# Altium PCB Optical Compressor.PcbDoc (part 2 of 2)
Units mm, origin at the board's own origin, x right, y up, seen from the top; angles counter-clockwise.
Board outline 100 x 100 mm, 2 copper layers (Top Layer, Bottom Layer); 101 components, 65 nets, 289 pads, 0 vias.
Unrouted connection lines stored in the file: 219.
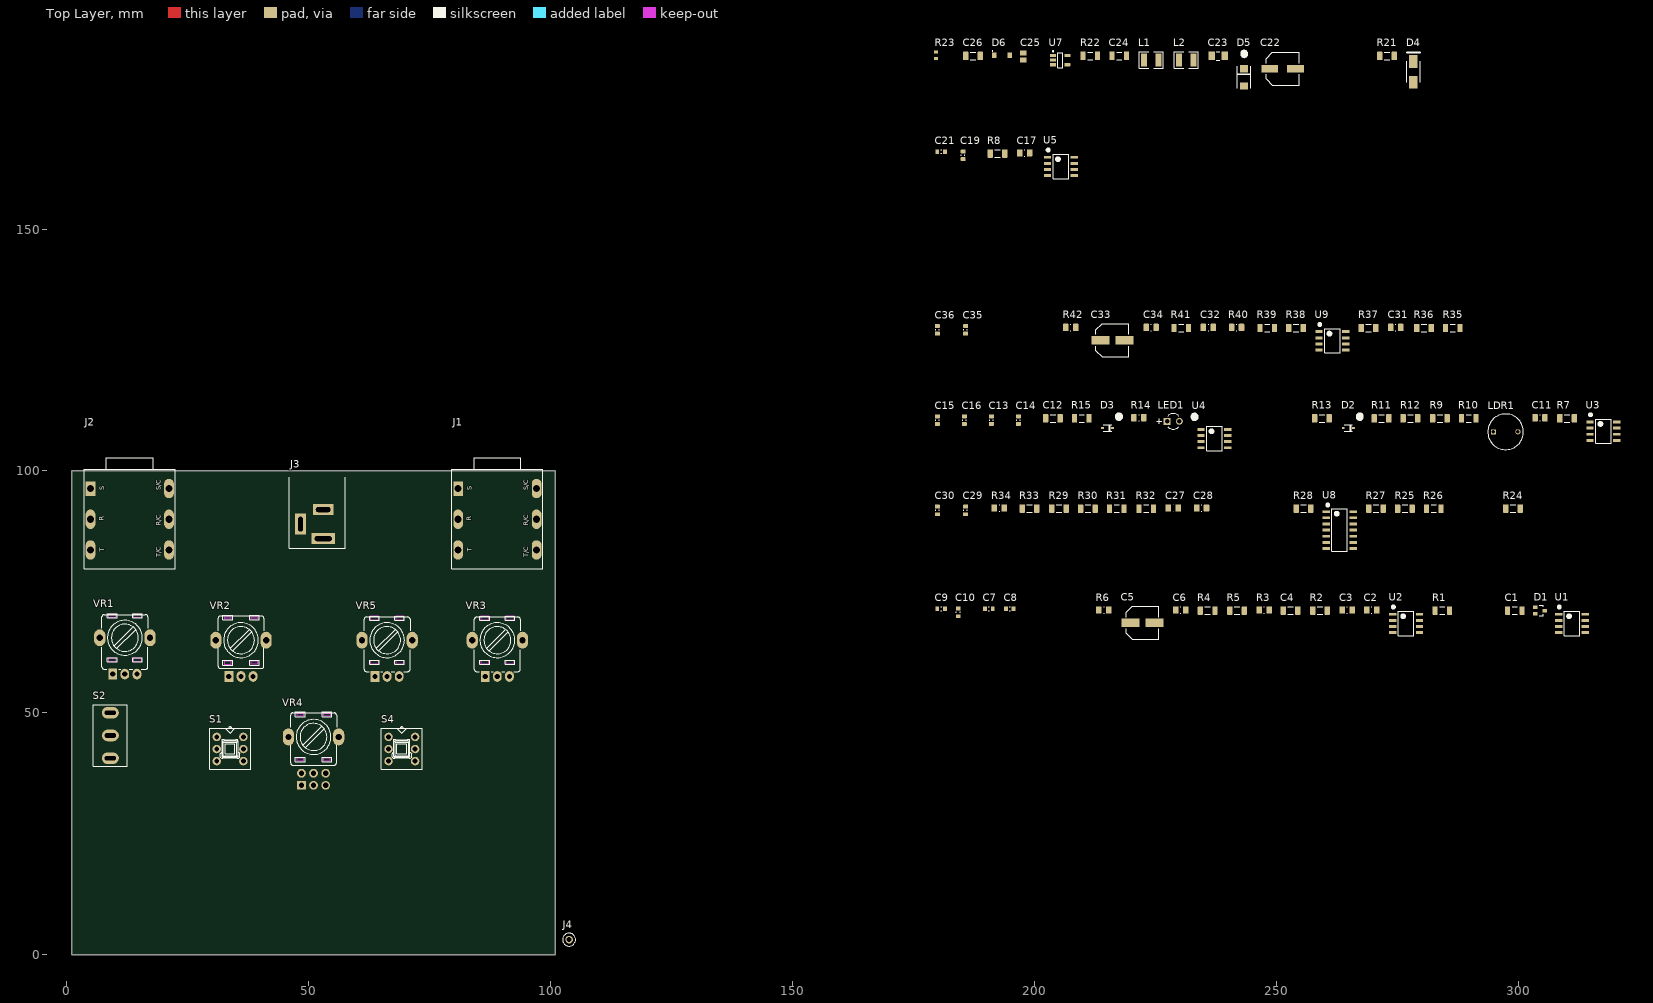
[diagram p0: Top Layer view]

## Part data (continued)
R11: library part CMP-03910-2, "Resistor 30k +-1% 1206 Thin film 0.25W +-50ppm/°C", Maximum working voltage=150V, Power=250mW, Resistance=33k, Temperature Coefficient (ppm/°C)=25, Tolerance (+-)=0.1%, Composition="Thin film", Size (Imperial)=1206
R14: library part CMP-03835-2, "Resistor 5.6k +-1% 1206 Thin film 0.25W +-50ppm/°C", Power=125mW, Resistance=10k, Temperature Coefficient (ppm/°C)=25, Tolerance (+-)=0.1%, Composition="Thin film", Size (Imperial)=0805
R15: library part CMP-04792-2, "Resistor 680R +-5% 1206 Thick film 0.25W +-100ppm/°C", Maximum working voltage=200V, Power=250mW, Resistance=680, Temperature Coefficient (ppm/°C)=100, Tolerance (+-)=5%, Composition="Thick film", Size (Imperial)=1206
R21: library part CMP-02882-2, "Resistor 10R +-1% 1206 Thin film 0.25W +-50ppm/°C", Maximum working voltage=200V, Power=250mW, Resistance=10, Temperature Coefficient (ppm/°C)=50, Tolerance (+-)=1%, Composition="Thin film", Size (Imperial)=1206
R22: library part CMP-03910-2, "Resistor 30k +-1% 1206 Thin film 0.25W +-50ppm/°C", Maximum working voltage=200V, Power=250mW, Resistance=30k, Temperature Coefficient (ppm/°C)=100, Tolerance (+-)=5%, Composition="Thick film", Size (Imperial)=1206
R23: library part CMP-2000-06942-1, "Chip Resistor, 4.7 KOhm, +/- 1%, 0.1 W, -55 to 155 degC, 0603 (1608 Metric), RoHS, Tape and Reel", Case Code - in=0603, Case Code - mm=1608, Manufacturer=Yageo, Operating Temperature Range=-55Cto+155C, Package Description="2-Pin Surface Mount Device, Body 1.6 x 0.8 mm", Power Rating=100mW, Resistance=4.7kOhms, Temperature Coefficient=100PPM/C, Tolerance=1%, Voltage Rating=50V, Datasheet URL=http://www.yageo.com/documents/recent/PYu-RC_Group_51_RoHS_L_7.pdf, Datasheet Version="Rev. 7, 05/2017", Manufacturer URL=http://www.yageo.com/, Mounting Technology=SurfaceMount, Package Reference=0603, Packaging=Reel, Product=ThickFilmResistorsGeneralPurpose, Series=RC, Termination Style=SMD/SMT
R24 R31: library part CMP-03910-2, "Resistor 30k +-1% 1206 Thin film 0.25W +-50ppm/°C", Maximum working voltage=150V, Power=250mW, Resistance=5.6k, Temperature Coefficient (ppm/°C)=25, Tolerance (+-)=0.1%, Composition="Thin film", Size (Imperial)=1206
R25 R28 R32 R33: library part CMP-03808-2, "Resistor 3.3k +-1% 1206 Thin film 0.25W +-50ppm/°C", Maximum working voltage=150V, Power=250mW, Resistance=5.6k, Temperature Coefficient (ppm/°C)=25, Tolerance (+-)=0.1%, Composition="Thin film", Size (Imperial)=1206
R29 R30: library part CMP-03808-2, "Resistor 3.3k +-1% 1206 Thin film 0.25W +-50ppm/°C", Maximum working voltage=200V, Power=250mW, Resistance=3.3k, Temperature Coefficient (ppm/°C)=50, Tolerance (+-)=1%, Composition="Thin film", Size (Imperial)=1206
R34: library part CMP-02591-2, "Resistor 11.3k +-1% 0805 Thin film 0.125W +-50ppm/°C", Maximum working voltage=150V, Power=125mW, Resistance=11.3k, Temperature Coefficient (ppm/°C)=50, Tolerance (+-)=1%, Composition="Thin film", Size (Imperial)=0805
R35: library part CMP-03751-1, "Resistor 1k +-1% 1206 Thin film 0.25W +-50ppm/°C", Maximum working voltage=150V, Power=250mW, Resistance=10k, Temperature Coefficient (ppm/°C)=25, Tolerance (+-)=0.1%, Composition="Thin film", Size (Imperial)=1206
R36: library part CMP-04019-2, "Resistor 330k +-1% 1206 Thin film 0.25W +-50ppm/°C", Maximum working voltage=150V, Power=250mW, Resistance=2.2k, Temperature Coefficient (ppm/°C)=25, Tolerance (+-)=0.1%, Composition="Thin film", Size (Imperial)=1206
R37: library part CMP-03860-2, "Resistor 10k +-1% 1206 Thin film 0.25W +-50ppm/°C", Maximum working voltage=150V, Power=250mW, Resistance=1k, Temperature Coefficient (ppm/°C)=25, Tolerance (+-)=0.1%, Composition="Thin film", Size (Imperial)=1206
R38: library part CMP-03662-2, "Resistor 100R +-1% 1206 Thin film 0.25W +-50ppm/°C", Maximum working voltage=150V, Power=250mW, Resistance=2.2k, Temperature Coefficient (ppm/°C)=25, Tolerance (+-)=0.1%, Composition="Thin film", Size (Imperial)=1206
R39: library part CMP-03662-2, "Resistor 100R +-1% 1206 Thin film 0.25W +-50ppm/°C", Maximum working voltage=150V, Power=250mW, Resistance=10k, Temperature Coefficient (ppm/°C)=25, Tolerance (+-)=0.1%, Composition="Thin film", Size (Imperial)=1206
R40: library part CMP-03860-2, "Resistor 10k +-1% 1206 Thin film 0.25W +-50ppm/°C", Case Code (Imperial)=0805, Case Code (Metric)=2012, Max Operating Temperature=125°C, Max Power Dissipation=125mW, Min Operating Temperature=-55°C, Package Quantity=5000, Resistance=330kR, Temperature Coefficient=50ppm/°C, Tolerance=1%, Voltage Rating=150V, Case/Package=0805, ComponentLink1Description=https://datasheet.ciiva.com/5990/1392914-5990598.pdf?src-supplier=Farnell, ComponentLink1URL=https://datasheet.ciiva.com/5990/1392914-5990598.pdf?src-supplier=Farnell, ComponentLink2Description=https://datasheet.ciiva.com/5990/1392914-5990601.pdf?src-supplier=Farnell, ComponentLink2URL=https://datasheet.ciiva.com/5990/1392914-5990601.pdf?src-supplier=Farnell, ComponentLink3Description=https://datasheet.ciiva.com/2561/pyu-rt-1-to-0-05-rohs-l-5-2561162.pdf?src-supplier=Digi-Key, ComponentLink3URL=https://datasheet.ciiva.com/2561/pyu-rt-1-to-0-05-rohs-l-5-2561162.pdf?src-supplier=Digi-Key, Composition="Thin Film", Contact Plating=Tin, Depth=1.25mm, Design Item ID="Res 0805 330k 1%", Height=0.024inch, LatestRevisionDate=17-Jul-2002, LatestRevisionNote="Re-released for DXP Platform.", Lead Free="Lead Free", Length=0.079inch, Military Standard=Not, Number of Pins=2, Number of Terminations=2, PackageDescription="Axial Device, Thru-Hole; 2 Leads; 0.5 in Pin Spacing", PackageReference=AXIAL-0.5, Packaging="Tape and Reel", Power Rating=125mW, Pricing 1="1 = 0,10000, 10 = 0,09300, 100 = 0,03580, 1000 = 0,01573, 2500 = 0,01358 (USD)", Published=8-Jun-2000, Publisher="Altium Limited", Radiation Hardening=No, REACH SVHC="No SVHC", RoHS=Yes, Source=main.SchLib, Stock 1=1168, Termination=SMD/SMT, Voltage Rating (DC)=150V, Width=0.049inch
R41: library part CMP-03860-2, "Resistor 10k +-1% 1206 Thin film 0.25W +-50ppm/°C", Maximum working voltage=150V, Power=250mW, Resistance=2.2k, Temperature Coefficient (ppm/°C)=25, Tolerance (+-)=0.1%, Composition="Thin film", Size (Imperial)=1206
R42: library part CMP-03860-2, "Resistor 10k +-1% 1206 Thin film 0.25W +-50ppm/°C", Maximum working voltage=150V, Power=125mW, Resistance=3.3k, Temperature Coefficient (ppm/°C)=50, Tolerance (+-)=1%, Composition="Thin film", Size (Imperial)=0805
S1 S4: library part CMP-028-0063-7, "DPDT Pushbutton Latching", Current Rating=100mA, Manufacturer=E-Switch, Manufacturer Part Number=TL2201EEXA, Max Voltage Rating (DC)=30V, Operating Force=2.16N, Package Quantity=700, Actuator Length=3mm, ComponentLink1Description=https://datasheet.ciiva.com/2879/p010350g-2879559.pdf?src-supplier=Digi-Key, ComponentLink1URL=https://datasheet.ciiva.com/2879/p010350g-2879559.pdf?src-supplier=Digi-Key, ComponentLink2Description=https://datasheet.ciiva.com/16156/p010350f-16156301.pdf?src-supplier=Onlinecomponents.com, ComponentLink2URL=https://datasheet.ciiva.com/16156/p010350f-16156301.pdf?src-supplier=Onlinecomponents.com, Contact Material=Silver, Darkglass part=D00-0005, Design Item ID="Push Vertical", Electrical Life=10000Cycles, Lead Free="Lead Free", Mount="Through Hole", Orientation=Straight, Packaging=Bulk, Pricing 1="1=0,70000, 10=0,66300, 25=0,63400, 50=0,60400, 100=0,58900, 250=0,57400, 500=0,54500, 1000=0,51500, 2500=0,49200, 10000=0,49200 (USD)", RoHS=Yes, Selective Soldering=YES, Source=main.SchLib, Stock 1=351, Supplied by Darkglass=YES, Switch Function=On-On, Termination="PC Pin", Throw Configuration=DPDT, Voltage Rating (DC)=30V
S2: library part CMP-028-0103-3, "SPDT toggle switch", Darkglass part=D00-0023, Design Item ID="Switch SPDT toggle", Selective Soldering=Yes, Source=main.SchLib, Supplied by Darkglass=Yes
U1 U3 U4 U9: library part CMP-028-0012-7, "Operational Amplifiers - Op Amps Dual Low Noise JFET SOIC8", Case/Package=D, Dual Supply Voltage=9V, Input Bias Current=200pA, Input Offset Voltage (Vos)=3mV, Manufacturer 1="Texas Instruments", Max Dual Supply Voltage=18V, Max I/O Voltage=10mV, Max Operating Temperature=85°C, Min Dual Supply Voltage=3.5V, Min Operating Temperature=-40°C, Nominal Supply Current=5mA, Operating Supply Current=1.4mA, Package Quantity=75, Voltage Gain=106.02dB, Bandwidth=3MHz, Common Mode Rejection Ratio=70dB, ComponentLink1Description=http://www.ti.com/general/docs/lit/getliterature.tsp?genericPartNumber=TL072&&fileType=pdf&src-supplier=Avnet, ComponentLink1URL=http://www.ti.com/general/docs/lit/getliterature.tsp?genericPartNumber=TL072&&fileType=pdf&src-supplier=Avnet, ComponentLink2Description=https://www.distrelec.biz/Web/Downloads/_t/ds/tl07x-series_eng_tds.pdf?mime=application%2Fpdf&src-supplier=Distrelec, ComponentLink2URL=https://www.distrelec.biz/Web/Downloads/_t/ds/tl07x-series_eng_tds.pdf?mime=application%2Fpdf&src-supplier=Distrelec, ComponentLink3Description=http://www.ti.com/lit/ds/symlink/tl071a.pdf?src-supplier=Digi-Key, ComponentLink3URL=http://www.ti.com/lit/ds/symlink/tl071a.pdf?src-supplier=Digi-Key, ComponentLink4Description=http://www.farnell.com/datasheets/1862384.pdf?src-supplier=Element14, ComponentLink4URL=http://www.farnell.com/datasheets/1862384.pdf?src-supplier=Element14, ComponentLink5Description=http://focus.ti.com/lit/ds/symlink/tl074.pdf?src-supplier=Avnet+Asia, ComponentLink5URL=http://focus.ti.com/lit/ds/symlink/tl074.pdf?src-supplier=Avnet+Asia, Design Item ID=TL072CD, Gain Bandwidth Product=3MHz, Height=1.58mm, Lead Free="Lead Free", Length=4.9mm, Manufacturer Part Number 1=TL072CD, Nominal Gain Bandwidth Product=3MHz, Number of Amplifiers=2, Number of Channels=2, Number of Circuits=2, Number of Elements=2, Number of Pins=8, Operating Supply Voltage=18V, Packaging=Rail/Tube, Pricing 1="1 = 0.71000, 10 = 0.59500, 50 = 0.59500, 100 = 0.38400, 1000 = 0.30700, 10000 = 0.25000 (USD)", Radiation Hardening=No, REACH SVHC="No SVHC", RoHS=Yes, Slew Rate=13V/µs, Source=main.SchLib, Stock 1=14514, Unity Gain Bandwidth Product=3MHz, Width=3.91mm
  U4: PartId=1
U2 U5: library part CMP-032-0003-7, "IC OPAMP GP 5MHZ 8SOIC", Case/Package=SOIC, Input Bias Current=10pA, Input Offset Voltage (Vos)=250uV, Manufacturer="Texas Instruments", Max Dual Supply Voltage=18V, Max Operating Temperature=85°C, Max Supply Voltage=36V, Min Dual Supply Voltage=2.25V, Min Operating Temperature=-40°C, Min Supply Voltage=4.5V, Operating Supply Current=1.6mA, Output Current per Channel=75mA, Voltage Gain=130dB, Common Mode Rejection Ratio=90dB, ComponentLink1Description=http://www.ti.com/general/docs/lit/getliterature.tsp?genericPartNumber=OPA1688&&fileType=pdf&src-supplier=Avnet, ComponentLink1URL=http://www.ti.com/general/docs/lit/getliterature.tsp?genericPartNumber=OPA1688&&fileType=pdf&src-supplier=Avnet, ComponentLink2Description=http://www.ti.com/lit/gpn/opa1688?src-supplier=Mouser, ComponentLink2URL=http://www.ti.com/lit/gpn/opa1688?src-supplier=Mouser, ComponentLink3Description=http://www.ti.com/lit/ds/symlink/opa1688.pdf?src-supplier=Digi-Key, ComponentLink3URL=http://www.ti.com/lit/ds/symlink/opa1688.pdf?src-supplier=Digi-Key, Design Item ID=OPA1688IDR, Gain Bandwidth Product=10MHz, Lead Free="Lead Free", Manufacturer Part Number=OPA1688IDR, Mount="Surface Mount", Number of Channels=2, Number of Circuits=2, Number of Pins=8, Packaging="Tape and Reel", Pricing 1="1=1,56000, 10=1,32000, 100=1,06000, 500=0,92400, 1000=0,76600, 2500=0,71300 (USD)", RoHS=Yes, Slew Rate=8V/µs, Source=jimi.SchLib, Stock 1=19835
U7: library part CMP-0069-01166-3, "1.4MHz Cuk Converter, 5-pin SOT-23, Pb-Free", Manufacturer="Texas Instruments", PackageTopMarking=S40B*XTT, PowerWise=N, ComponentLink1Description="Datasheet URL", ComponentLink1URL=http://www.ti.com/general/docs/lit/getliterature.tsp?genericPartNumber=LM2611&fileType=pdf, CompType=Switcher, PackageDescription="Molded SOT-23, .115 x .063 x .040 in Body, 5 Lead, .0375 in Pitch", PackageReference=DBV0005A, PinCount=5, RoHS=Y
U8: library part CMP-028-0019-6, "Operational Amplifiers - Op Amps 2-18V Quad Low Power Industrial Temp SOIC14", Case/Package=SOIC, Input Bias Current=500nA, Input Offset Voltage (Vos)=3mV, Manufacturer="ON Semiconductor", Manufacturer Part Number=MC33179DR2G, Max Dual Supply Voltage=18V, Max Operating Temperature=85°C, Min Dual Supply Voltage=2V, Min Operating Temperature=-40°C, Nominal Supply Current=1.7mA, Output Current=80mA, Output Current per Channel=100mA, Package Quantity=2500, Power Supply Rejection Ratio (PSRR)=80dB, Voltage Gain=106.02dB, Bandwidth=5MHz, Common Mode Rejection Ratio=80dB, ComponentLink1Description=https://datasheet.ciiva.com/30481/0900766b81276f1b-30481445.pdf?src-supplier=RSComponents, ComponentLink1URL=https://datasheet.ciiva.com/30481/0900766b81276f1b-30481445.pdf?src-supplier=RSComponents, ComponentLink2Description=https://datasheet.ciiva.com/5787/89824-5787686.pdf?src-supplier=Farnell, ComponentLink2URL=https://datasheet.ciiva.com/5787/89824-5787686.pdf?src-supplier=Farnell, ComponentLink3Description=https://datasheet.ciiva.com/26056/mc33178-d-26056822.pdf?src-supplier=Avnet+Europe, ComponentLink3URL=https://datasheet.ciiva.com/26056/mc33178-d-26056822.pdf?src-supplier=Avnet+Europe, ComponentLink4Description=https://datasheet.ciiva.com/1796/mc33178-d-1796957.pdf?src-supplier=Digi-Key, ComponentLink4URL=https://datasheet.ciiva.com/1796/mc33178-d-1796957.pdf?src-supplier=Digi-Key, ComponentLink5Description=https://datasheet.ciiva.com/1796/mc33178-d-1796959.pdf?src-supplier=Digi-Key, ComponentLink5URL=https://datasheet.ciiva.com/1796/mc33178-d-1796959.pdf?src-supplier=Digi-Key, ComponentLink6Description=https://datasheet.ciiva.com/2973/mc33178-d-2973668.pdf?src-supplier=Avnet, ComponentLink6URL=https://datasheet.ciiva.com/2973/mc33178-d-2973668.pdf?src-supplier=Avnet, ComponentLink7Description=https://datasheet.ciiva.com/16212/mc33178-d-16212327.pdf?src-supplier=Future+Electronics, ComponentLink7URL=https://datasheet.ciiva.com/16212/mc33178-d-16212327.pdf?src-supplier=Future+Electronics, ComponentLink8Description=https://datasheet.ciiva.com/8078/89824-8078570.pdf?src-supplier=Element14, ComponentLink8URL=https://datasheet.ciiva.com/8078/89824-8078570.pdf?src-supplier=Element14, ComponentLink9Description=https://datasheet.ciiva.com/1796/mc33178-d-1796958.pdf?src-supplier=Digi-Key, ComponentLink9URL=https://datasheet.ciiva.com/1796/mc33178-d-1796958.pdf?src-supplier=Digi-Key, ComponentLink10Description=http://datasheet.octopart.com/MC33179DR2G-ON-Semiconductor-datasheet-164248.pdf?src-supplier=Newark, ComponentLink10URL=http://datasheet.octopart.com/MC33179DR2G-ON-Semiconductor-datasheet-164248.pdf?src-supplier=Newark, ComponentLink11Description=http://datasheet.octopart.com/MC33179DR2G-ON-Semiconductor-datasheet-14137761.pdf?src-supplier=IIIC, ComponentLink11URL=http://datasheet.octopart.com/MC33179DR2G-ON-Semiconductor-datasheet-14137761.pdf?src-supplier=IIIC, ComponentLink12Description=http://datasheet.octopart.com/MC33179DR2G-ON-Semiconductor-datasheet-82522822.pdf?src-supplier=Newark, ComponentLink12URL=http://datasheet.octopart.com/MC33179DR2G-ON-Semiconductor-datasheet-82522822.pdf?src-supplier=Newark, Contact Plating=Tin, Design Item ID=MC33179D, Gain Bandwidth Product=5MHz, Halogen Free="Halogen Free", Height=1.5mm, Lead Free="Lead Free", Length=8.75mm, Max Supply Voltage=18V, Mouser part=863-MC33179DR2G, Nominal Gain Bandwidth Product=5MHz, Number of Amplifiers=4, Number of Channels=4, Number of Circuits=4, Number of Elements=4, Number of Pins=14, Operating Supply Current=1.7mA, Packaging="Tape and Reel", Pricing 1="1 = 0.97000, 10 = 0.86300, 100 = 0.67300, 500 = 0.55598, 1000 = 0.43893 (USD)", Radiation Hardening=No, REACH SVHC="No SVHC", Slew Rate=2V/µs, Source=main.SchLib, Stock 1=2859, Unity Gain Bandwidth Product=5MHz, Width=4mm
VR1 VR5: library part CMP-028-0053-5, "LJV 9mm pot", Manufacturer Part Number 1="RP09110NOBA-H02-1485 (C104,KA15A6.5)", Darkglass part=D00-0002, Design Item ID="Pot100kC 9mm", Selective Soldering=YES, SET POSITION=1, Source=main.SchLib, Supplied by Darkglass=YES
VR2: library part CMP-028-0051-3, "LJV 9mm pot", Manufacturer Part Number="RP09110NOBA-H02-1484 (A104,KA15A6.5)", Darkglass part=D00-0000, Design Item ID="Pot100kA 9mm", PartId=1, Selective Soldering=YES, SET POSITION=1, Source=main.SchLib, Supplied by Darkglass=YES
VR3: library part CMP-028-0053-5, "LJV 9mm pot", Manufacturer Part Number 1=RP09110NOBA-H02-2253, Darkglass part=D00-0002, Design Item ID="Pot100kC 9mm", Selective Soldering=YES, SET POSITION=1, Source=main.SchLib, Supplied by Darkglass=YES
VR4: library part CMP-028-0097-4, "Dual gang rev log pot", Design Item ID="Pot100kC DUAL LJV", Selective Soldering=YES, SET POSITION=1, Source=main.SchLib, Supplied by Darkglass=YES

## Nets (pads, with @x,y where several pads share a name; then routed paths per layer and width w, separated by ;. In a path a pad name is that pad's centre, name@x,y a point inside that pad or via, vN(x,y) a via of type N, cw(c..) or ccw(c..) an arc to the next point about the centre after c; other vN are vias at no path point)
+9V: C7.2 C8.2 C13.2 C14.2 C19.2 C22.1 C24.2 C29.2 C35.2 D1.2 D5.2 L1.1 R21.2 U1.8 U2.8 U3.8 U4.8 U5.8 U7.4 U7.5 U8.4 U9.4
-9V: C9.1 C10.1 C15.1 C16.1 C21.1 C25.2 C26.2 C30.1 C36.1 D1.1 L2.2 R22.1 U1.4 U2.4 U3.4 U4.4 U5.4 U8.11 U9.8
GND: C4.1 C5.2 C7.1 C8.1 C9.2 C10.2 C12.1 C13.1 C14.1 C15.2 C16.2 C19.1 C21.2 C22.2 C24.1 C26.1 C29.1 C30.2 C33.2 C35.1 C36.2 D5.1 D6.2 J1.1 J1.6 J2.1 J2.2 J2.4 J2.5 J2.6 J3.1 J3.3 LED1.2 R2.2 R4.1 R9.2 R23.1 R34.2 U3.5 U4.3 U4.5 U7.2 U8.5 U8.10 U8.12 U9.3 U9.5 VR1.4 VR1.5 VR2.3 VR2.4 VR2.5 VR3.4 VR3.5 VR4.7 VR4.8 VR5.4 VR5.5
NetC1_1: C1.1 D1.3 R1.2
NetC1_2: C1.2 C4.2 R2.1 U1.3
NetC2_1: C2.1 S2.1
NetC2_2: C2.2 U2.3
NetC3_1: C3.1 C6.2 R3.2 U2.7
NetC3_2: C3.2 S1.1 S1.4 S2.3
NetC5_1: C5.1 VR1.1
NetC6_1: C6.1 R3.1 R6.1 U2.6
NetC11_1: C11.1 R10.1 U3.1
NetC11_2: C11.2 R37.1 VR2.1
NetC12_2: C12.2 D3.2 R11.1 R15.2
NetC17_1: C17.1 U5.1 U5.2
NetC17_2: C17.2 R8.2
NetC23_1: C23.1 L1.2 U7.1
NetC23_2: C23.2 D6.1 L2.1
NetC25_1: C25.1 R22.2 R23.2 U7.3
NetC27_1: C27.1 R29.2 U8.6
NetC27_2: C27.2 R33.2 U8.7 VR4.6
NetC28_1: C28.1 R30.2 U8.9
NetC28_2: C28.2 R24.2 R31.1 U8.8
NetC31_1: C31.1 R37.2
NetC31_2: C31.2 U5.5
NetC32_1: C32.1 S4.4
NetC32_2: C32.2 R41.1
NetC33_1: C33.1 VR5.1
NetC34_1: C34.1 R40.1 R42.1 U5.6
NetC34_2: C34.2 R38.1 R40.2 U5.7
NetD2_1: D2.1 R11.2 R14.2 U4.2
NetD2_2: D2.2 D3.1 U4.1
NetD4_A: D4.A J3.2
NetD4_K: D4.K R21.1
NetJ1_3: J1.3 J1.4 R1.1
NetJ2_3: J2.3 R8.1
NetLED1_1: LED1.1 R15.1
NetR4_2: R4.2 R5.1 U2.2
NetR5_2: R5.2 U2.1 U2.5
NetR6_2: R6.2 VR1.2 VR1.3
NetR7_1: R7.1 U3.3
NetR7_2: R7.2 U1.6 U1.7
NetR9_1: R9.1 R10.2 U3.2
NetR12_1: R12.1 R13.2 U3.6
NetR12_2: R12.2 R14.1 U3.7
NetR13_1: R13.1 VR2.2
NetR24_1: R24.1 R25.1 R28.2 U8.2
NetR25_2: R25.2 R26.2 U8.1 VR4.3
NetR26_1: R26.1 S4.2 S4.5
NetR27_1: R27.1 S4.3 S4.6
NetR27_2: R27.2 R32.2 U8.14
NetR28_1: R28.1 S1.3 S1.6
NetR29_1: R29.1 VR4.1 VR4.2
NetR30_1: R30.1 VR4.4 VR4.5
NetR31_2: R31.2 R32.1 U8.13
NetR33_1: R33.1 R34.1 U8.3
NetR35_1: R35.1 R39.2 U9.6
NetR35_2: R35.2 U9.7 VR3.3
NetR36_1: R36.1 R38.2 R41.2 U9.2
NetR36_2: R36.2 R39.1 U9.1
NetR42_2: R42.2 VR5.2 VR5.3
NetS1_2: S1.2 S1.5 S4.1 U1.5
NetS2_2: S2.2 U1.1 U1.2 VR3.1
NetU4_6: U4.6 U4.7
NetU5_3: U5.3 VR3.2
pads on no net: J1.2 J1.5 J4.1 LDR1.1 LDR1.2

## Text inside footprints (layer, text, board x,y; h text height)
J1: Top Overlay "T" at 83.7,83.3 h1 r90; Top Overlay "T/C" at 95.4,82.1 h1 r90; Top Overlay "R/C" at 95.4,88.7 h1 r90; Top Overlay "R" at 83.6,89.7 h1 r90; Top Overlay "S" at 83.7,96 h1 r90; Top Overlay "S/C" at 95.4,96 h1 r90
J2: Top Overlay "S/C" at 19.4,96 h1 r90; Top Overlay "S" at 7.7,96 h1 r90; Top Overlay "R" at 7.6,89.7 h1 r90; Top Overlay "R/C" at 19.4,88.7 h1 r90; Top Overlay "T/C" at 19.4,82.1 h1 r90; Top Overlay "T" at 7.7,83.3 h1 r90